# EAGLE board avr (EAGLE 6.5.0)
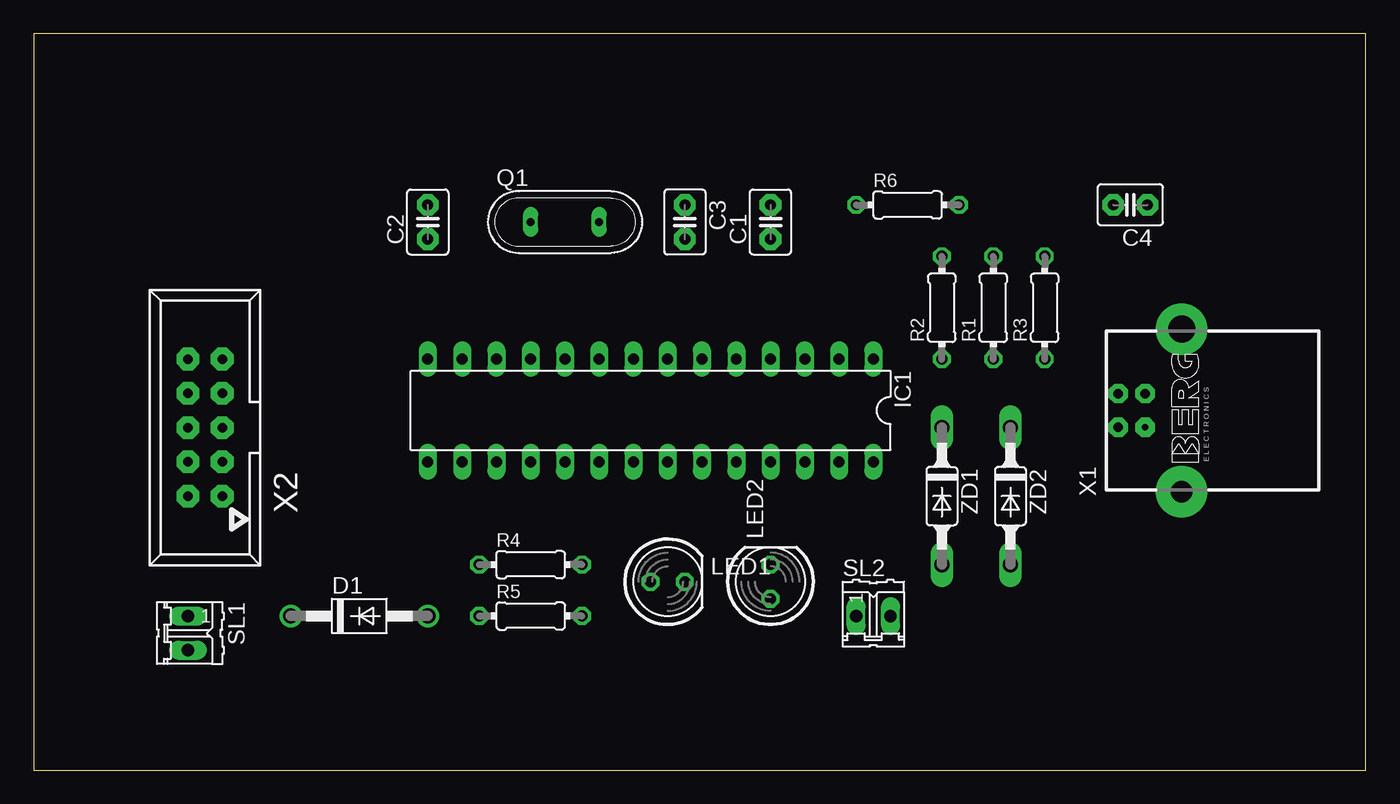
[diagram p0: board, top side]
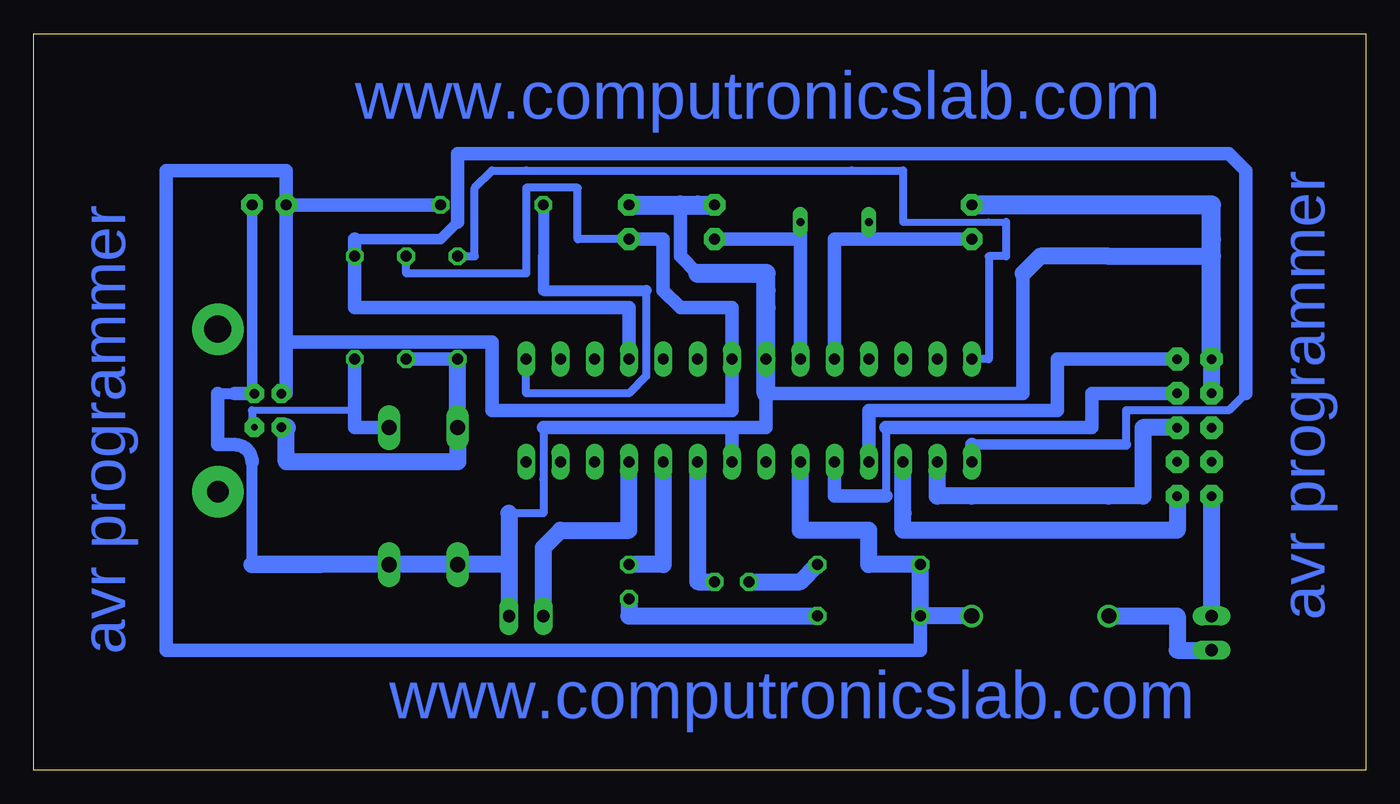
[diagram p1: board, bottom side, seen from below]

Size 98.73 x 54.6 mm. Coordinates in mm from the lower left corner, seen from the top.
Outline: 0,0 98.73,0 98.73,54.6 0,54.6 0,0
Copper layers (1*16): Top 0.035mm / dielectric 1.5mm / Bottom 0.035mm
Design rules "default *": minimum track width 10mil, minimum drill 24mil, track to track 8mil, track to pad 8mil, pad to pad 8mil, via to via 8mil, smd to smd 8mil, copper to edge 40mil, drill to drill 8mil, minimum pad ring 10mil, minimum via ring 8mil, stop-mask expansion 4mil, vias tented up to drill 0mil, thermal gap 10mil

## Footprints (pad centres in the part's own frame; a part is rotated, then mirrored left to right if it is on the bottom)
C2.5-3 = drill 0.813 pad 1.6 octagon: 1 -1.27,0; 2 1.27,0
DO41-10 = drill 1.118: A 5.08,0; C -5.08,0
DIL28-3 = drill 0.813 long: 1 -16.51,-3.81; 2 -13.97,-3.81; 3 -11.43,-3.81; 4 -8.89,-3.81; 5 -6.35,-3.81; 6 -3.81,-3.81; 7 -1.27,-3.81; 8 1.27,-3.81; 9 3.81,-3.81; 10 6.35,-3.81; 11 8.89,-3.81; 12 11.43,-3.81; 13 13.97,-3.81; 14 16.51,-3.81; 15 16.51,3.81; 16 13.97,3.81; 17 11.43,3.81; 18 8.89,3.81; 19 6.35,3.81; 20 3.81,3.81; 21 1.27,3.81; 22 -1.27,3.81; 23 -3.81,3.81; 24 -6.35,3.81; 25 -8.89,3.81; 26 -11.43,3.81; 27 -13.97,3.81; 28 -16.51,3.81
LED5MM = drill 0.813 octagon: A -1.27,0; K 1.27,0
QS = drill 0.61 long: 1 -2.54,0; 2 2.54,0
0204/7 = drill 0.813 octagon: 1 -3.81,0; 2 3.81,0
02P = drill 0.914 long: 1 -1.27,0; 2 1.27,0
PN61729-S = drill 0.7 pad 1.422 octagon: 1 1.25,4.71; 2 -1.25,4.71; 4 1.25,2.71 | drill 0.5 pad 1.422 octagon: 3 -1.25,2.71 | drill 1.6 pad 3.81: S1 -6.02,0 | drill 2 pad 3.81: S2 6.02,0
057-010-1 = drill 0.7 pad 1.676 octagon: 1 -5.08,-1.27; 2 -5.08,1.27; 3 -2.54,-1.27; 4 -2.54,1.27; 5 0,-1.27; 6 0,1.27; 7 2.54,-1.27; 8 2.54,1.27; 9 5.08,-1.27; 10 5.08,1.27
SOD81 = drill 1.118 long: A 5.08,0; C -5.08,0

## Placement (x,y rotation side)
C1  0.1uf  [C2.5-3]  54.61,40.64 90 top
C2  22pf  [C2.5-3]  29.21,40.64 90 top
C3  22pf  [C2.5-3]  48.26,40.64 270 top
C4  10uf  [C2.5-3]  81.28,41.91 180 top
D1  1N4007  [DO41-10]  24.13,11.43 0 top
IC1  QT9701BD  [DIL28-3]  45.72,26.67 180 top
LED1  5mm  [LED5MM]  46.99,13.97 0 top
LED2  5mm  [LED5MM]  54.61,13.97 90 top
Q1  12 MHZ  [QS]  39.37,40.64 0 top
R1  2.6k  [0204/7]  71.12,34.29 90 top
R2  70E  [0204/7]  67.31,34.29 90 top
R3  70E  [0204/7]  74.93,34.29 90 top
R4  1K  [0204/7]  36.83,15.24 0 top
R5  1K  [0204/7]  36.83,11.43 0 top
R6  10K  [0204/7]  64.77,41.91 0 top
SL1  jumper  [02P]  11.43,10.16 270 top
SL2  jumper  [02P]  62.23,11.43 0 top
X1  PN61729-S  [PN61729-S]  85.09,26.67 90 top
X2  avr conn  [057-010-1]  12.7,25.4 90 top
ZD1  3.6v  [SOD81]  67.31,20.32 270 top
ZD2  3.6v  [SOD81]  72.39,20.32 270 top

## Library data of the parts
C1-C4 = capacitor-wima
D1 ZD1 ZD2 = diode
IC1 = quantum-research-group; OC_FARNELL: unknown; OC_NEWARK: unknown
LED1 LED2 = led
Q1 = special
R1-R6 = resistor
SL1 SL2 = con-amp-quick; OC_FARNELL: unknown; OC_NEWARK: unknown
X1 = con-berg; OC_FARNELL: unknown; OC_NEWARK: unknown
X2 = con-panduit; OC_FARNELL: unknown; OC_NEWARK: unknown

## Nets
N$1: C3.2 IC1.9 Q1.2
N$2: C2.1 IC1.10 Q1.1
N$3: IC1.1 R6.1
N$4: R1.1 R2.1 X1.2 ZD1.C
N$5: C1.2 C2.2 C3.1 C4.1 IC1.8 IC1.22 SL2.2 X1.4 X2.8 X2.10 ZD1.A ZD2.A
N$6: IC1.14 R2.2
N$7: R3.1 X1.3 ZD2.C
N$8: IC1.4 IC1.15 R3.2
N$9: C1.1 C4.2 D1.A IC1.7 IC1.20 R1.2 R4.1 R5.1 R6.2 X1.1
N$10: IC1.24 LED2.K
N$11: D1.C SL1.2
N$13: IC1.23 LED1.K
N$14: LED2.A R5.2
N$15: SL1.1 X2.2
N$16: IC1.17 X2.1
N$17: IC1.16 X2.5
N$18: IC1.19 X2.7
N$19: IC1.18 X2.9
N$20: IC1.25 SL2.1
N$21: LED1.A R4.2

## Tracks (layer width: path | path; a pad name or v marks a point on that pad's centre or on a via)
N$1
  Bottom 1.016: C3.2 43.18,39.37 41.91,39.37 Q1.2 IC1.9
N$2
  Bottom 1.016: 35.56,39.37 38.1,39.37 36.83,39.37 Q1.1 | C2.1 35.56,39.37 | IC1.10 39.37,39.37 35.56,39.37
N$3
  Bottom 0.61: IC1.1 62.23,27.94 59.69,27.94 54.61,27.94 53.34,29.21 53.34,35.56
  Bottom 0.813: 60.96,38.1 60.96,35.56 | 60.96,35.56 53.34,35.56 | R6.1 60.96,38.1 | 60.96,38.1 60.96,35.56 | 60.96,35.56 60.96,38.1
N$4
  Bottom 1.016: R1.1 R2.1
  Bottom 1.27: 80.01,25.4 80.01,22.86 77.47,22.86 69.85,22.86 67.31,22.86 ZD1.C R2.1
  Bottom 1.422: 80.01,25.4 X1.2
N$5
  Bottom 0.254: ZD1.A 63.5,15.24 | 46.99,25.4 44.45,25.4 | 11.43,38.1 19.05,38.1 | 82.55,27.94 X1.4 82.55,27.94
  Bottom 0.61: 63.5,19.05 60.96,19.05 60.96,21.59 60.96,25.4
  Bottom 0.762: C4.1 82.55,27.94
  Bottom 0.813: 85.09,27.94 83.82,27.94 | 77.47,15.24 82.55,15.24 82.55,22.86
  Bottom 1.016: 83.82,27.94 82.55,27.94 | 85.09,27.94 85.09,24.13 83.82,24.13 arc90 82.55,22.86 | IC1.22 46.99,25.4 | 49.53,36.83 50.8,38.1 50.8,41.91 | 25.4,36.83 25.4,27.94 29.21,27.94 44.45,27.94 44.45,25.4 60.96,25.4
  Bottom 1.27: 63.5,15.24 SL2.2 | 77.47,15.24 ZD2.A ZD1.A 63.5,15.24 | 77.47,15.24 82.55,15.24 77.47,15.24 | 11.43,38.1 16.51,38.1 19.05,38.1 24.13,38.1 25.4,36.83 | X2.10 X2.8 | 63.5,19.05 63.5,15.24
  Bottom 1.422: C1.2 49.53,41.91 | 49.53,41.91 C3.1 | 44.45,27.94 IC1.8 44.45,34.29 44.45,35.56 44.45,36.83 46.99,36.83 49.53,36.83 | 50.8,41.91 49.53,41.91 | C2.2 22.86,41.91 15.24,41.91 11.43,41.91 11.43,39.37 11.43,38.1 X2.10
N$6
  Bottom 0.508: 26.67,40.64 27.94,40.64 34.29,40.64
  Bottom 0.61: IC1.14 27.94,30.48 27.94,38.1 26.67,38.1 26.67,40.64 | 34.29,40.64 34.29,44.45 38.1,44.45 62.23,44.45 64.77,44.45 66.04,43.18 66.04,38.1 R2.2
N$7
  Bottom 0.254: 82.55,25.4 X1.3
  Bottom 0.508: 82.55,26.67 81.28,26.67 74.93,26.67
  Bottom 0.61: 82.55,26.67 82.55,25.4
  Bottom 1.016: R3.1 74.93,26.67 74.93,25.4 ZD2.C
N$8
  Bottom 0.61: 17.78,24.13 17.78,26.67 15.24,26.67 10.16,26.67 8.89,27.94
  Bottom 0.762: 29.21,24.13 27.94,24.13 17.78,24.13 | 67.31,40.64 68.58,39.37 73.66,39.37 74.93,39.37
  Bottom 0.813: 60.96,34.29 58.42,34.29 60.96,34.29 | 74.93,35.56 74.93,34.29 74.93,35.56
  Bottom 1.016: 29.21,24.13 IC1.15 | 8.89,27.94 8.89,44.45 10.16,45.72 62.23,45.72 67.31,45.72 67.31,40.64 | 74.93,39.37 R3.2 74.93,35.56 74.93,34.29 60.96,34.29 58.42,34.29 54.61,34.29 IC1.4
N$9
  Bottom 0.61: R1.2 71.12,36.83 69.85,36.83 66.04,36.83 62.23,36.83 62.23,40.64 62.23,43.18 58.42,43.18 58.42,39.37 C1.1
  Bottom 1.016: C1.1 52.07,39.37 52.07,35.56 50.8,34.29 46.99,34.29 IC1.7 46.99,26.67 50.8,26.67 60.96,26.67 64.77,26.67 64.77,31.75 66.04,31.75 80.01,31.75 | C4.2 R6.2 | C4.2 80.01,31.75 | 80.01,31.75 80.01,27.94 X1.1 | 33.02,8.89 R5.1 33.02,8.89 | 88.9,8.89 33.02,8.89 | 88.9,11.43 88.9,44.45 81.28,44.45 80.01,44.45 80.01,43.18 C4.2 | 88.9,11.43 88.9,8.89 | 88.9,8.89 88.9,11.43
  Bottom 1.27: D1.A R5.1 R4.1 36.83,15.24 36.83,17.78 39.37,17.78 41.91,17.78 IC1.20
N$10
  Bottom 1.27: LED2.K 52.07,15.24 52.07,20.32 IC1.24
N$11
  Bottom 1.27: SL1.2 13.97,8.89 13.97,11.43 D1.C
N$13
  Bottom 0.254: 49.53,20.32 IC1.23 49.53,21.59 49.53,20.32
  Bottom 1.27: LED1.K 49.53,13.97 49.53,20.32 IC1.23
N$14
  Bottom 1.27: R5.2 54.61,11.43 LED2.A
N$15
  Bottom 1.27: X2.2 SL1.1
N$16
  Bottom 1.27: IC1.17 34.29,19.05 34.29,17.78 29.21,17.78 13.97,17.78 X2.1
N$17
  Bottom 1.27: IC1.16 31.75,20.32 29.21,20.32 19.05,20.32 16.51,20.32 16.51,22.86 16.51,25.4 X2.5
N$18
  Bottom 0.61: 35.56,20.32 35.56,21.59 35.56,25.4
  Bottom 1.016: IC1.19 39.37,20.32 36.83,20.32 35.56,20.32 | 35.56,25.4 20.32,25.4 20.32,27.94 17.78,27.94 X2.7
N$19
  Bottom 0.254: 22.86,26.67 24.13,26.67 22.86,26.67
  Bottom 1.016: IC1.18 36.83,26.67 24.13,26.67 22.86,26.67 22.86,30.48 19.05,30.48 17.78,30.48 X2.9
N$20
  Bottom 1.27: IC1.25 54.61,17.78 59.69,17.78 60.96,16.51 SL2.1
N$21
  Bottom 1.27: R4.2 41.91,13.97 LED1.A

## Text on the board
Bottom: www.computronicslab.com | avr programmer | avr programmer | www.computronicslab.com